# Altium PCB SFCmasterP.PcbDoc
Units mm, origin at the board's own origin, x right, y up, seen from the top; angles counter-clockwise.
Board outline 152.4 x 101.6 mm, 2 copper layers (Top Layer, Bottom Layer); 74 components, 45 nets, 188 pads, 1 vias.
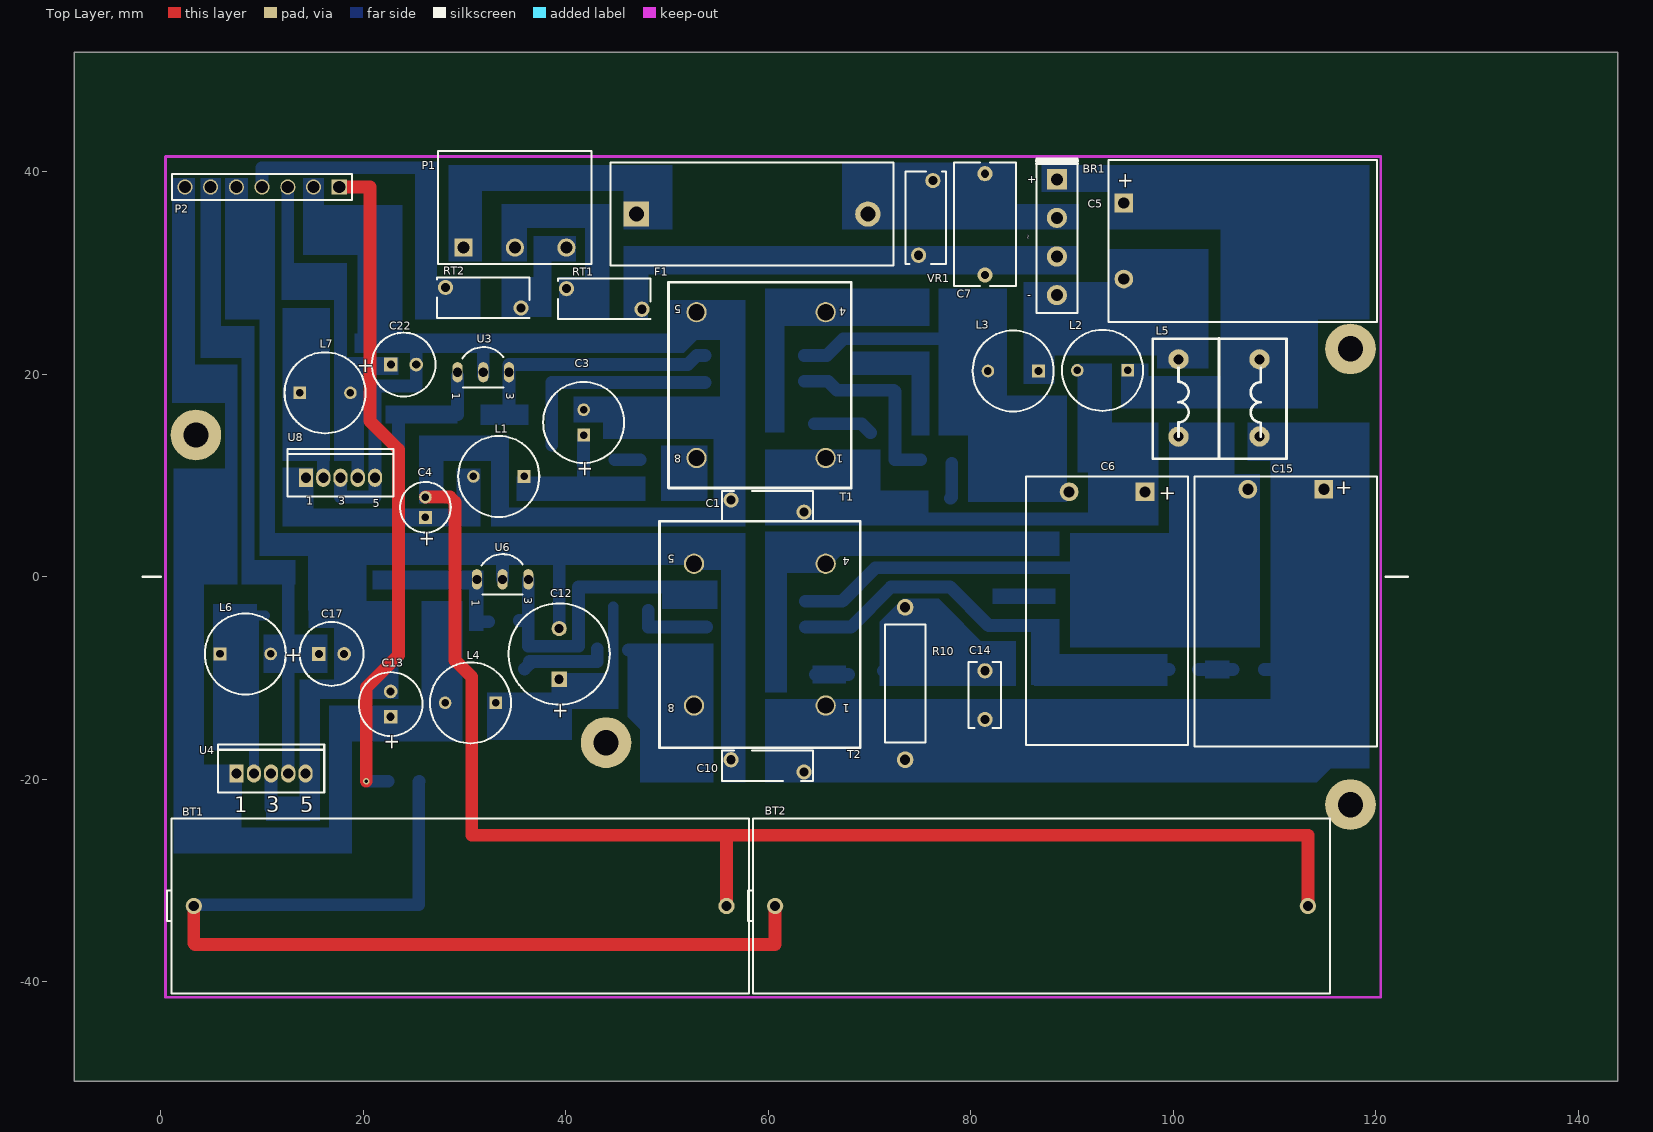
[diagram p0: Top Layer view]
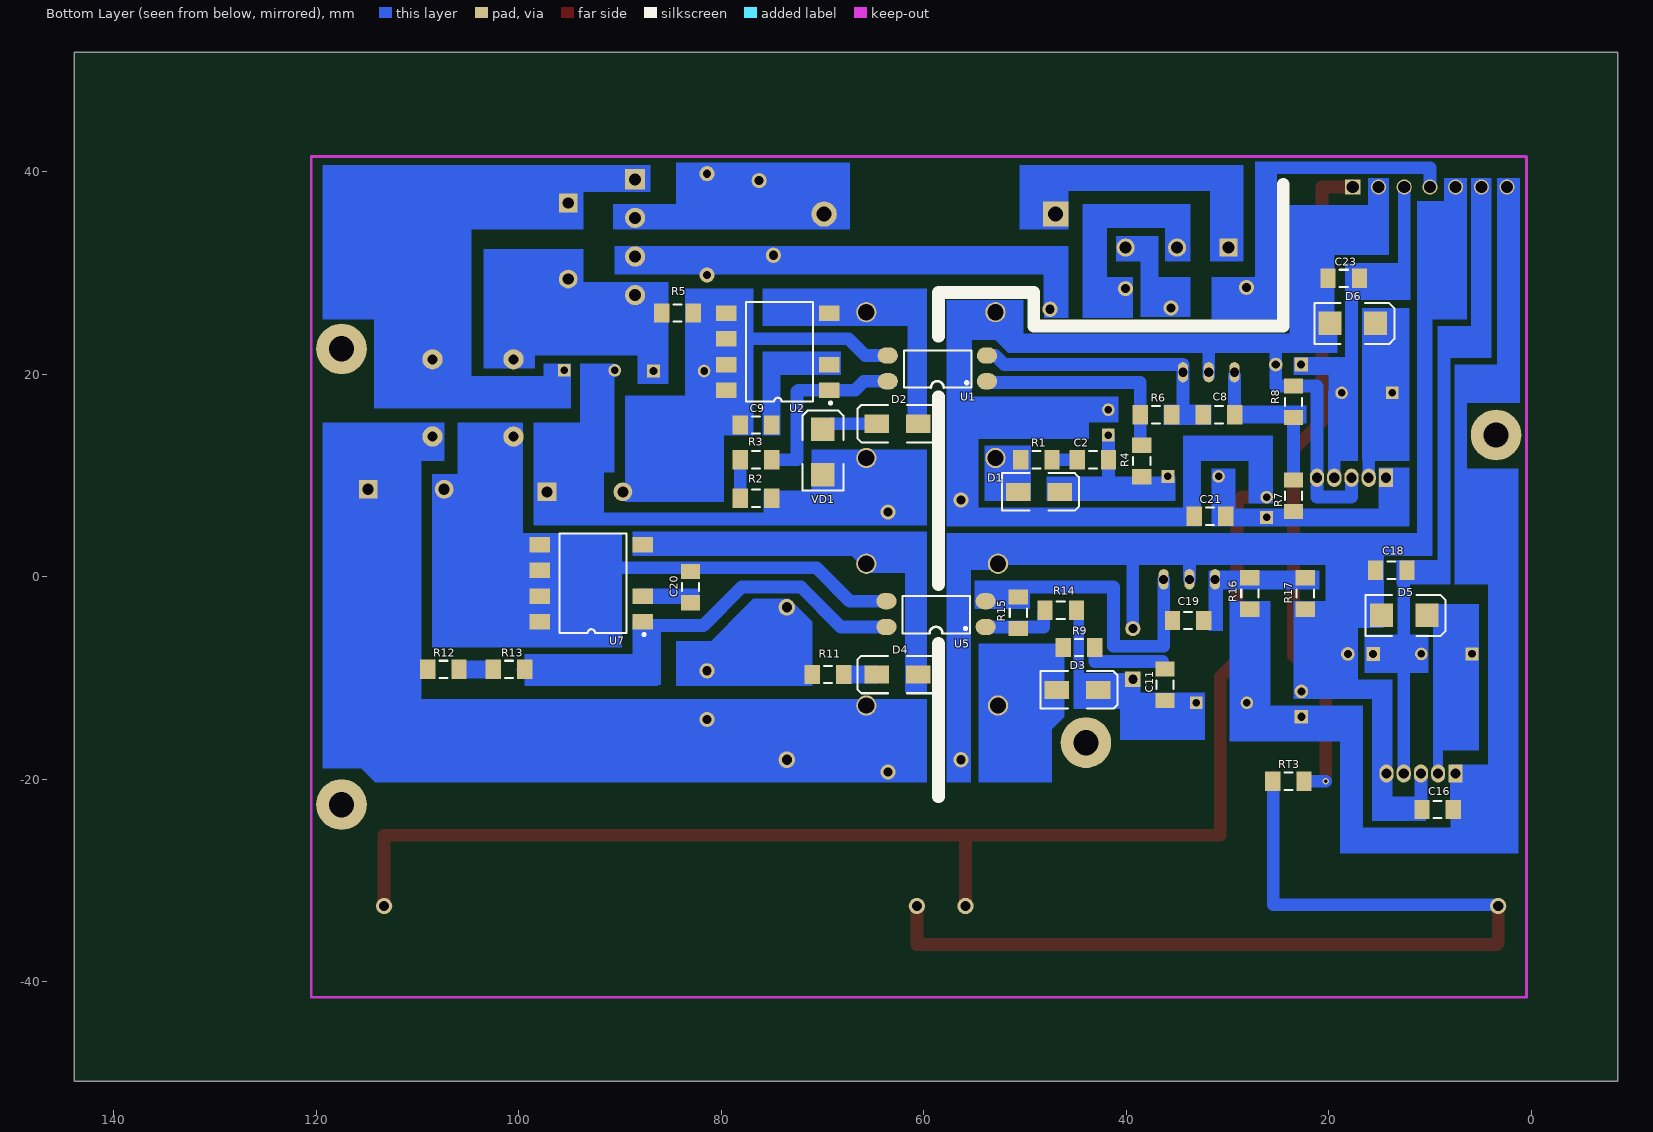
[diagram p1: Bottom Layer view, seen from below]

## Layer stack, top to bottom
Top Solder: solder mask 0.0102, Solder Resist, Dk 3.5
Top Layer: signal copper 0.0356
Dielectric 1: dielectric 0.32, FR-4, Dk 4.8
Bottom Layer: signal copper 0.0356
Bottom Solder: solder mask 0.0102, Solder Resist, Dk 3.5

## Board outline
-8.509,-49.813 143.891,-49.813 143.891,51.787 -8.509,51.787

## Design rules (kind name [scope] priority, off if disabled: settings)
Clearance [All] p1: gap=0.254
ComponentClearance [All] p1: gap=0 collisioncheckmode=3 verticalgap=2540 showdistances=FALSE
PolygonConnect [All] p1: connectstyle=Relief reliefconductorwidth=0.254 reliefentries=4 polygonreliefangle="90 Angle" airgapwidth=0.254
RoutingVias [All] p1: holewidth=0.711 width=1.27 viastyle="Through Hole" minholewidth=0.711 minwidth=1.27 maxholewidth=0.711 maxwidth=1.27
SilkToSilkClearance [All] p1 off: silktosilkclearance=0
SilkToSolderMaskClearance [IsPad] p1 off: minsilkscreentomaskgap=0.254 clearancetoexposedcopper=TRUE
SolderMaskExpansion [All] p1: expansion=0.102
Width Width_POWER_PORT_N [All] p1: maxlimit=2.54 minlimit=0.508 preferedwidth=1.27
Width Width_POWER_PORT_L [InNet('POWER_PORT_L')] p2: maxlimit=2.54 minlimit=0.508 preferedwidth=1.27
Width [All] p3: maxlimit=1.27 minlimit=0.254 preferedwidth=1.27
26 further rules are at their usual default settings.

## Classes and differential pairs
component class powerB: C10 C11 C12 C13 C14 C15 C16 C17 C18 C19 C20 D3 D4 D5 L4 L5 L6 R9 R10 R11 R12 R13 R14 R15 R16 R17 T2 U4 U5 U6 U7
component class powerA: BR1 BT1 BT2 C1 C2 C3 C4 C5 C6 C7 C8 C9 C21 C22 C23 D1 D2 D6 F1 L1 L2 L3 L7 P1 P2 R1 R2 R3 R4 R5 R6 R7 R8 RT1 RT2 RT3 T1 U1 U2 U3 U8 VD1 VR1

## Components (designator, comment, footprint, x,y, rotation, side; value= is the part's Value field where it differs from the comment)
BR1 "KBP310" BRD1 88.519,33.528 r0 top
BT1 "2400mAh" BAT-14500 29.591,-32.512 r0 top locked
BT2 "2400mAh" BAT-14500 86.995,-32.512 r0 top locked
C1 "2.2nF/250V" CAPRD5-9x3B 59.944,6.985 r180 top
C2 "82pF/100V" CAPC3216M 43.307,11.557 r0 bottom
C3 "680uF/16V" CAPPR2.5-8x12 41.783,15.24 r90 top
C4 "100uF/16V" CAPPR2-5x7 26.162,6.858 r90 top
C5 "22uF/450V" CAPPR7.5-16x25B 95.123,33.147 r90 top locked
C6 "22uF/450V" CAPPR7.5-16x25B 93.472,8.382 r0 top
C7 "0.1uF/275V" CAPRD10-12x6 81.407,34.798 r90 top
C8 "0.1uF" CAPC3216M 30.861,16.002 r0 bottom
C9 "10uF/16V" CAPC3216M 76.581,14.986 r0 bottom
C10 "2.2nF/250V" CAPRD5-9x3B 59.944,-18.669 r180 top
C11 "22pF/500V" CAPC3216M 36.195,-10.668 r90 bottom
C12 "330uF/50V" CAPPR5-10x16 39.37,-7.62 r90 top
C13 "100uF/35V" CAPPR2.5-6.3x11.5 22.733,-12.573 r90 top
C14 "3.3nF/1KV" CAPRD5-4.5x3A 81.407,-11.684 r90 top
C15 "47uF/450V" CAPPR7.5-18x25A 111.125,8.636 r180 top
C16 "0.1uF" CAPC3216M 9.271,-22.987 r0 bottom
C17 "220uF/10V" CAPPR2.5-6.3x11.5 16.891,-7.62 r0 top
C18 "0.1uF" CAPC3216M 13.843,0.635 r180 bottom
C19 "0.47nF/50V" CAPC3216M 33.909,-4.318 r0 bottom
C20 "10uF/16V" CAPC3216M 83.058,-1.016 r90 bottom
C21 "0.1uF" CAPC3216M 31.75,5.969 r0 bottom
C22 "220uF/10V" CAPPR2.5-6.3x11.5 24.003,20.955 r0 top
C23 "0.1uF" CAPC3216M 18.542,29.464 r180 bottom
D1 "UF4004" SMA 48.641,8.382 r180 bottom
D2 "FR106(RS1M)" SMA 62.611,15.113 r0 bottom
D3 "UF4004" SMA 44.831,-11.176 r180 bottom
D4 "FR106(RS1M)" SMA 62.611,-9.652 r0 bottom
D5 "1N5825" SMB 12.573,-3.81 r180 bottom
D6 "1N5825" SMB 17.653,25.019 r180 bottom
F1 "BLX-B" FUSE22 58.42,35.814 r0 top
L1 "3.3uH/2.66A" L0810 33.401,9.906 r180 top
L2 "1mH/0.19A" L0810 93.027,20.383 r180 top
L3 "1mH/0.19A" L0810 84.201,20.32 r180 top
L4 "3.3uH/2.66A" L0810 30.607,-12.446 r180 top
L5 "6mH/1.6A" TRF_4A 104.521,17.653 r90 top
L6 "33uH/3A" L0810 8.382,-7.62 r0 top
L7 "33uH/3A" L0810 16.256,18.161 r0 top
P1 "Header A3" DG500HH-5.08-3 35,32.5 r0 top locked
P2 "Header 7" HDR1X7 10.033,38.481 r180 top locked
R1 "130R 1%" RESC3216M 48.895,11.557 r0 bottom
R2 "2M" RESC3216M 76.581,7.747 r180 bottom
R3 "2M" RESC3216M 76.581,11.557 r180 bottom
R4 "130R 1%" RESC3216M 38.481,11.43 r270 bottom
R5 "4.7K" RESC3216M 84.328,26.035 r0 bottom
R6 "1K %1" RESC3216M 37.084,16.002 r0 bottom
R7 "34K 1%" RESC3216M 23.495,8.001 r270 bottom
R8 "13K 1%" RESC3216M 23.495,17.272 r270 bottom
R9 "470R" RESC3216M 44.681,-6.985 r0 bottom
R10 "24K 1W" RES13.55-11.5X4.2 73.533,-10.541 r90 top
R11 "13R" RESC3216M 69.469,-9.652 r180 bottom
R12 "2M" RESC3216M 107.442,-9.144 r0 bottom
R13 "2M" RESC3216M 100.965,-9.144 r180 bottom
R14 "499R 1%" RESC3216M 46.482,-3.302 r180 bottom
R15 "1K %1" RESC3216M 50.673,-3.556 r270 bottom
R16 "130K 1%" RESC3216M 27.813,-1.651 r270 bottom
R17 "15K 1%" RESC3216M 22.352,-1.651 r90 bottom
RT1 "MF72-5D9" CAPRD7.5-11x4A 43.815,27.432 r0 top
RT2 "MF72-5D9" CAPRD7.5-11x4A 31.877,27.559 r0 top
RT3 "500mA/30V" RESC3216M 24.003,-20.193 r0 bottom
T1 "Trans 4C" EE19W(2+2) 59.309,18.923 r180 top locked
T2 "Trans 4C" EE22W(2+2) 59.182,-5.715 r180 top locked
U1 "PS2501-1-K-A" SOP-4 58.674,20.574 r0 bottom
U2 "TNY275GN" SMD-8C 74.422,22.225 r0 bottom
U3 "TL431AILP" TO-92AA 31.877,20.193 r270 top
U4 "LM2596T-5.0" TO-220-5 10.922,-19.431 r0 top
U5 "PS2501-1-K-A" SOP-4 58.801,-3.683 r0 bottom
U6 "TL431AILP" TO-92AA 33.782,-0.254 r270 top
U7 "TNY280GN" SMD-8C 92.837,-0.635 r0 bottom
U8 "LM2596T-5.0" TO-220-5 17.78,9.779 r0 top
VD1 "SMBJ180A" SMB 69.977,12.319 r90 bottom
VR1 "10D471K" CAPRD7.5-7x4C 75.565,35.433 r270 top

## Footprints (in the part's own frame and the unit in brackets; to place one, negate y for a bottom-side part, rotate by r counter-clockwise, add the part's x,y. Pads: shape width x height; smd on the part's side, far side on the other; paste and mask are expansions set on the pad)
BAT-14500 [mm] "14500电池盒57mmx16.8mmx14mm,pitch = 52.6mm"
  round 1.6 hole 1: 1(-26.3,0) 2(26.3,0)
  silkscreen extent -28.96,-8.64 28.5,8.64
BRD1 [mm] "AC-DC Bridge; Body  14.5mm(L)x11.3mm(H)x4mm(W); Lead Dia. 0.5 mm (max)"
  rect 2x2 hole 1.2: 1(0,5.715)
  round 2 hole 1.2: 2(0,1.905) 3(0,-1.905) 4(0,-5.715)
  silkscreen extent -2.03,-7.49 2.03,7.75
CAPC3216M [mm] "Chip Capacitor, Body 3.2x1.6mm, IPC Low Density"
  rect 1.5x1.9 smd: 1(-1.55,0) 2(1.55,0)
  silkscreen extent -0.4,-0.85 0.4,0.85, body extent -1.7,-0.9 1.7,0.9, height 1.35
CAPPR2-5x7 [mm] "Capacitor, Electrolytic, Radial; Body 5 x 7 mm (Dia.xH typ); Pin Spacing 2 mm (typ)"
  rect 1.25x1.25 hole 0.75: 1(-1,0)
  round 1.25 hole 0.75: 2(1,0)
  silkscreen extent -2.5,-2.5 2.5,2.5
CAPPR2.5-6.3x11.5 [mm] "Capacitor, Electrolytic, Radial; Body 6.3 x 11.5 mm (Dia.xH typ); Pin Spacing 2.5 mm (typ)"
  rect 1.35x1.35 hole 0.8: 1(-1.25,0)
  round 1.35 hole 0.8: 2(1.25,0)
  silkscreen extent -3.15,-3.15 3.15,3.15
CAPPR2.5-8x12 [mm] "Capacitor, Electrolytic, Radial; Body 8 x 12 mm (Dia.xH typ); Pin Spacing 2.5 mm (typ)"
  rect 1.25x1.25 hole 0.75: 1(-1.25,0)
  round 1.25 hole 0.75: 2(1.25,0)
  silkscreen extent -4,-4 4,4
CAPPR5-10x16 [mm] "Capacitor, Electrolytic, Radial; Body 10 x 16 mm (Dia.xH typ); Pin Spacing 5 mm (typ)"
  rect 1.5x1.5 hole 0.9: 1(-2.5,0)
  round 1.5 hole 0.9: 2(2.5,0)
  silkscreen extent -5,-5 5,5
CAPPR7.5-16x25B [mm] "Capacitor, Electrolytic, Radial; Body 16 x 25 mm (Dia.xH typ); Pin Spacing 7.5 mm (typ)"
  rect 1.85x1.85 hole 1.1: 1(3.75,0)
  round 1.85 hole 1.1: 2(-3.75,0)
  silkscreen extent -8,-25 8,1.52
CAPPR7.5-18x25A [mm] "Capacitor, Electrolytic, Radial; Body 18 x 25 mm (Dia.xH typ); Pin Spacing 7.5 mm (typ)"
  rect 1.85x1.85 hole 1.1: 1(-3.75,0)
  round 1.85 hole 1.1: 2(3.75,0)
  silkscreen extent -9,-1.27 9,25.4
CAPRD5-4.5x3A [mm] "Capacitor, Ceramic, Thru-Hole, Disc; Body 4.5 x 3mm (LxW max) Pin Spacing 5 mm (typ)"
  round 1.5 hole 0.9: 1(-2.4,0) 2(2.4,0)
  silkscreen extent -3.25,-1.6 3.25,1.6
CAPRD5-9x3B [mm] "Capacitor, Ceramic, Thru-Hole, Disc; Body 9 x 3 mm (LxW max) Pin Spacing 5 mm (typ)"
  round 1.5 hole 0.9: 1(-3.6,0.6) 2(3.6,-0.6)
  silkscreen extent -4.5,-1.5 4.5,1.5
CAPRD7.5-7x4C [mm] "Capacitor, Ceramic, Thru-Hole, Disc; Body 7 x 4 mm (LxW max) Pin Spacing 7.5 mm (typ)"
  round 1.5 hole 0.9: 1(-3.684,0.7) 2(3.684,-0.7)
  silkscreen extent -4.57,-2 4.57,2
CAPRD7.5-11x4A [mm] "Capacitor, Ceramic, Thru-Hole, Disc; Body 11 x 4 mm (LxW max) Pin Spacing 7.5 mm (typ)"
  round 1.5 hole 0.9: 1(-3.725,1.016) 2(3.725,-1.016)
  silkscreen extent -4.57,-2 4.57,2
CAPRD10-12x6 [mm] "Capacitor, Ceramic, Thru-Hole, Disc; Body 12 x 6 mm (LxW max) Pin Spacing 10.0 mm (typ)"
  round 1.5 hole 0.8: 1(-5,0) 2(5,0)
  silkscreen extent -6.1,-3.05 6.1,3.05
DG500HH-5.08-3 [mm] "Connector; Header; 2 Position,Pitch 5.08 mm"
  rect 1.8x1.8 hole 1.2: 1(-5.08,0)
  round 1.8 hole 1.2: 2(0,0) 3(5.08,0)
  silkscreen extent -7.58,-1.6 7.58,9.56
EE19W(2+2) [mm] "EE19 switch transfor pitch 14.4"
  round 2 hole 1.6: 1(-6.375,7.2) 4(-6.375,-7.2) 5(6.375,-7.2) 8(6.375,7.2)
  silkscreen extent -8.89,-10.16 9.14,10.16
EE22W(2+2) [mm] "EE22 switch transfor pitch 14.4"
  round 2 hole 1.6: 1(-6.5,7) 4(-6.5,-7) 5(6.5,-7) 8(6.5,7)
  silkscreen extent -9.91,-11.18 9.91,11.18
FUSE22 [mm] "Fuse, Thru-Hole; 2 Leads; Body 26 x 10 x 16 mm (LxWxH max),Space=22mm"
  rect 2.5x2.5 hole 1.5: 1(-11.43,0)
  round 2.5 hole 1.5: 2(11.43,0)
  silkscreen extent -13.97,-5.08 13.97,5.08
HDR1X7 [mm] "Connector; Header; 7 Position;Pitch 2.54mm"
  rect 1.5x1.5 hole 1.2: 1(-7.62,0)
  round 1.5 hole 1.2: 2(-5.08,0) 3(-2.54,0) 4(0,0) 5(2.54,0) 6(5.08,0) 7(7.62,0)
  silkscreen extent -8.89,-1.27 8.89,1.27
L0810 [mm] "Inductor, Electrolytic, Radial; Body 8 x 10 mm (Dia.xH typ); Pin Spacing 5 mm (typ)"
  rect 1.25x1.25 hole 0.75: 1(-2.5,0)
  round 1.25 hole 0.75: 2(2.5,0)
  silkscreen extent -4,-4 4,4
RES13.55-11.5X4.2 [mm] "Resistor, Axial; Body 11.5 x 4.2 mm (LxDia. max), Lead Dia. 0.65 mm (max)"
  round 1.65 hole 1: 1(-7.525,0) 2(7.525,0)
  silkscreen extent -5.84,-2 5.84,2
RESC3216M [mm] "Chip Resistor, Body 3.2x1.6mm, IPC Low Density"
  rect 1.5x1.9 smd: 1(-1.55,0) 2(1.55,0)
  silkscreen extent -0.4,-0.85 0.4,0.85, body extent -1.68,-0.87 1.68,0.87, height 0.71
SMA [mm] "DO-214-AC/SMA; 2 C-Bend Leads; Body 5 x 2.7 mm, inc. leads (LxW)"
  rect 2.4x1.8 smd: 1(-2.05,0) 2(2.05,0)
  silkscreen extent -3.65,-1.85 3.95,1.85
SMB [mm] "DO-214-AA/SMB; 2 C-Bend Leads; Body 5.3 x 3.6 mm, inc. leads (LxW)"
  rect 2.3x2.3 smd: 1(-2.25,0) 2(2.25,0)
  silkscreen extent -3.8,-2.03 4.1,2.03
SMD-8C [mil] "Small Outline; 8 Leads; Body Width 9.65 mm; Pitch 2.54 mm"
  rect 80x60 smd: 1(-200,150) 2(-200,50) 4(-200,-150) 5(200,-150) 6(200,-50) 7(200,50) 8(200,150)
  silkscreen extent -210,-193 124,205
SOP-4 [mm] "body=6.5mmx4.58mm(LxW),pitch=2.54mm"
  oval 2x1.6 smd: 1(-4.9,1.27) 2(-4.9,-1.27) 3(4.9,-1.27) 4(4.9,1.27)
  silkscreen extent -3.36,-1.78 3.3,1.91
TO-92AA [mm] "TO, Flat Index; 3 In-Line, Axial Leads; Body Dia. 4.5mm; Leads 0.51 x 0.48 mm (max);pitch 2.54mm"
  oval 2x1 hole 0.9: 1(0,-2.54) 2(0,0) 3(0,2.54)
  silkscreen extent -2.48,-2.07 1.5,1.99
TO-220-5 [mm] "TO, Thru-Hole, Vertical, Heatsink Mounted; 5 In-Line Leads; Pitch 1.70 mm"
  rect 1.4x1.8 hole 1: 1(-3.4,0)
  oval 1.4x1.8 hole 1: 2(-1.7,0) 3(0,0) 4(1.7,0) 5(3.4,0)
  silkscreen extent -5.25,-1.85 5.25,2.85
TRF_4A [mm] "pitch 7.62mmx8mm(LxW)"
  round 2 hole 1: 1(-3.816,4) 2(-3.804,-4) 3(3.816,4) 4(3.816,-4)
  silkscreen extent -5.98,-6.67 5.92,6.54

## Part data
BR1: library part KP210, "AC-DC Bridge"
BT1 BT2: library part Battery, "Battery holder"
C1 C2 C7 C8 C9 C10 C11 C14 C16 C18 C19 C20 C21 C23: library part Cap, "Capacitor"
C3 C4 C5 C6 C12 C13 C15 C17 C22: library part "Cap Pol1", "Polarized Capacitor (Radial)"
D1 D2 D3 D4: library part "Diode 1N4148", "High Conductance Fast Diode"
D5 D6 VD1: library part "D Zener", "Zener Diode"
F1: library part "Fuse 1", "Fuse Holder 25mm(L)x10mm(W)x13mm(H)"
L1 L2 L3 L4: library part "Inductor Iron Dot", "Magnetic-Core Inductor with Winding Polarity Marking"
L5: library part "Inductor Iron Dot Inphase", "Conjugate stream coil,pitch 7.62mmx8mm(LxW)"
L6 L7: library part Inductor, "Inductor with Winding No Polarity Marking"
P1: "Header, 3-Pin"
P2: "Header, 7-Pin"
R1 R2 R3 R4 R5 R6 R7 R8 R9 R10 R11 R12 R13 R14 R15 R16 R17: library part "Res Semi", "Metal film Resistor"
RT1 RT2 RT3: library part "Res Thermal", "Thermistor"
T1 T2: "Transformer"
U1 U5: library part PC817D, "Single-Supply Dual Operational Amplifier,10MHz"
U2 U7: library part TNY279PN
U3 U6: library part TL431CLP, "Programmable Precision Reference"
U4 U8: "5V稳压芯片"
VR1: library part "Res Varistor", "Varistor (Voltage-Sensitive Resistor)"

## Free pads (board coordinates)
  round 5 hole 2.5: 0(3.5,14) 0(44,-16.38) 0(117.5,-22.5) 0(117.5,22.5)

## Via types
v1: diameter 0.6, hole 0.3, Top Layer to Bottom Layer, 1 vias

## Nets (pads, with @x,y where several pads share a name; then routed paths per layer and width w, separated by ;. In a path a pad name is that pad's centre, name@x,y a point inside that pad or via, vN(x,y) a via of type N, cw(c..) or ccw(c..) an arc to the next point about the centre after c; other vN are vias at no path point)
5V: C22.1 C23.2 L7.2 P2.3 U8.4 | length 39.7
  Bottom Layer w1.27: P2.3 12.573,29.464 17.78,29.464 17.78,20.955 C22.1 ; 18.542,20.955 18.756,20.741 L7.2 19.48,18.161 U8.4
5VA: C17.1 C18.2 L6.2 P2.6 U4.4 | length 70.3
  Bottom Layer w1.27: P2.6 4.953,22.987 8.636,22.987 8.636,0.762 12.622,0.762 12.622,-7.62 ; L6.2 12.622,-7.62 ; U4.4 12.622,-7.62 ; C17.1 12.622,-7.62
9V: C4.1 C21.1 L1.2 R7.2 U8.1 | length 19.5
  Bottom Layer w1.27: U8.1@14.38,9.623 14.38,6.096 C4.1@26.162,6.096 ; C21.1 30.901,6.67 L1.2
24V: C13.1 C16.1 L4.2 P2.7 R16.2 U4.1 | length 130.3
  Bottom Layer w1.27: P2.7 2.413,19.558 6.985,19.558 6.985,1.016 3.175,1.016 3.175,-25.908 17.653,-25.908 17.653,-13.823 26.226,-13.823 ; 3.175,-15.113 3.429,-15.113 3.048,-15.494 3.048,-19.431 7.291,-19.431 7.519,-19.203 7.519,-19.307 7.395,-19.431 C16.1@7.395,-22.987 ; L4.2 R16.2@28.107,-3.201
D+: BR1.1 C5.1 L2.1 L5.4 | length 55
  Bottom Layer w1.27: BR1.1 95.123,39.243 C5.1 108.521,36.897 108.521,18.796 95.591,18.796 L2.1@95.591,20.383
D-: BR1.4 C5.2 L3.1 L5.3 R5.2 | length 31
  Bottom Layer w1.27: R5.2 86.955,26.035 86.955,23.495 93.498,23.495 ; L3.1@86.955,20.32 86.955,23.328 87.463,23.328 87.63,23.495 ; 87.463,26.035 87.463,26.757 BR1.4 ; 93.599,23.495 100.521,23.495 L5.3 ; 95.123,23.495 C5.2
DC1+: C1.1 C6.1 L2.2 R2.2 T1.1 VD1.1 | length 61.7
  Bottom Layer w1.27: C1.1 65.684,6.385 ; T1.1 65.684,6.385 ; VD1.1@70.358,10.196 70.358,6.385 65.684,6.385 ; 70.866,7.747 74.904,7.747 74.904,5.715 93.218,5.715 93.218,20.383 L2.2 ; 93.218,7.747 C6.1@97.222,7.747
DC1-: C6.2 C9.2 L3.2 R5.1 U1.3 U2.5 U2.6 U2.7 U2.8 | length 53
  Bottom Layer w1.27: U1.3 65.786,21.844 67.437,23.495 U2.6@79.629,23.495 ; C9.2 80.01,14.986 ; U2.7@79.629,20.32 L3.2 ; R5.1 79.629,26.035 79.629,14.605 80.645,15.621 80.645,8.382 C6.2
DC2+: C10.1 C14.1 C15.1 L5.2 R10.1 R12.2 T2.1 | length 96.5
  Bottom Layer w1.27: C10.1 63.544,-14.338 65.786,-14.338 ; T2.1@65.682,-12.915 65.682,-14.234 65.786,-14.338 ; R10.1 73.533,-14.338 ; 73.66,-13.589 73.533,-13.716 73.533,-14.338 ; L5.2@108.521,13.722 111.887,13.722 111.887,7.366 ; R12.2 111.76,-9.144 ; 114.875,7.366 111.887,7.366 ; 65.786,-14.338 73.533,-14.338 ; 73.533,-14.338 111.887,-14.338 111.887,7.366
DC2-: C15.2 C20.2 L5.1 U5.3 U7.5 U7.6 U7.7 U7.8 | length 62
  Bottom Layer w1.27: U5.3 67.31,-2.413 70.612,0.889 97.663,0.889 U7.6 U7.5 100.521,3.175 100.521,7.433 ; U7.8 97.917,-0.254 ; L5.1 100.521,8.001 C15.2@107.375,8.001
FG: P2.4 RT2.1 | length 31.8
  Bottom Layer w1.27: P2.4 10.033,40.386 25.908,40.386 25.908,28.575 RT2.1
GND: BT1.2 BT2.2 C1.2 C3.2 C4.2 C21.2 C22.2 C23.1 D6.1 P2.2 R8.1 T1.5 U3.2 U8.3 U8.5 | length 298.4
  Top Layer w1.27: C4.2 28.591,7.858 29.083,7.366 29.083,-8.255 30.734,-9.906 30.734,-25.527 113.295,-25.527 BT2.2 ; BT1.2 55.891,-25.665
  Bottom Layer w1.27: P2.2 15.113,35.179 20.066,35.179 20.066,22.733 24.999,22.733 ; U8.3@17.78,9.652 U8.3 17.78,7.874 21.18,7.874 U8.5 21.18,18.796 ; 21.206,18.822 R8.1 25.253,18.822 25.253,22.733 51.054,22.733 51.054,25.908 51.269,26.123 T1.5 57.15,26.123 57.15,7.585 55.582,7.585 55.582,6.223 33.274,6.223 33.274,12.573 26.162,12.573 C4.2 ; U3.2@31.877,19.844 31.877,22.733 ; C3.2 57.15,16.49
GNDA: C10.2 C12.2 C13.2 C16.2 C17.2 C18.1 D5.1 P2.5 R17.1 T2.5 U4.3 U4.5 U6.2 | length 165.9
  Bottom Layer w1.27: P2.5 7.493,26.797 10.414,26.797 10.414,3.372 52.705,3.372 52.705,1.285 56.261,1.285 C10.2@56.261,-18.069 ; U4.3 10.922,-22.86 14.351,-22.86 14.351,-11.323 C13.2 ; 15.22,3.372 15.22,-3.175 15.246,-3.201 18.161,-3.201 ; 18.161,-11.303 18.161,-3.201 ; R17.1 18.161,-3.201 ; U6.2 33.782,3.302 ; C12.2 39.37,3.302
NetBR1_2: BR1.2 C7.2 F1.2 VR1.1 | length 26.9
  Bottom Layer w1.27: F1.2 70.231,35.433 76.265,35.433 ; VR1.1@76.219,39.163 VR1.1 76.265,35.433 ; C7.2 81.407,35.433 ; BR1.2 81.407,35.433 ; 76.265,35.433 81.407,35.433
NetBT1_1: BT1.1 BT2.1 RT3.2 | length 99.4
  Top Layer w1.27: BT1.1 3.291,-36.184 3.418,-36.311 60.695,-36.311 BT2.1
  Bottom Layer w1.27: BT1.1@3.291,-32.385 25.5,-32.385 25.5,-20.246 RT3.2
NetC2_1: C2.1 C3.1 D1.2 L1.1 R4.2 | length 17.6
  Bottom Layer w1.27: L1.1 35.901,8.676 41.91,8.676 ; C3.1@41.757,13.99 41.757,8.829 41.91,8.676 ; D1.2@46.863,8.676 41.91,8.676
NetC2_2: C2.2 R1.1 | length 2.5
  Bottom Layer w1.27: C2.2 R1.1
NetC8_1: C8.1 R7.1 R8.2 U3.1 | length 16
  Bottom Layer w1.27: R7.1@23.495,9.652 23.495,15.902 23.595,16.002 28.194,16.002 ; 28.194,16.129 28.321,16.002 C8.1 ; C8.1@29.337,16.002 U3.1@29.337,19.844
NetC8_2: C8.2 R6.1 U1.2 U3.3 | length 27.1
  Bottom Layer w1.27: 33.274,15.875 R6.1@35.534,15.875 ; 34.417,15.875 34.417,20.955 52.07,20.955 52.959,21.844 U1.2
NetC9_1: C9.1 U2.2 | length 11.4
  Bottom Layer w1.27: U2.2@69.596,20.955 75.031,20.955 C9.1
NetC11_1: C11.1 C12.1 D3.2 L4.1 R14.2 | length 21.9
  Bottom Layer w1: D3.2@43.942,-11.303 44.704,-10.541 R14.2@44.704,-2.921
  Bottom Layer w1.27: L4.1 40.005,-12.446 C12.1@40.005,-10.12 ; 40.005,-11.303 D3.2@43.942,-11.303
NetC11_2: C11.2 R9.1 | length 8.9
  Bottom Layer w1.27: C11.2@35.941,-9.118 36.449,-8.61 36.449,-8.382 43.131,-8.382 R9.1@43.131,-7.112
NetC14_2: C14.2 R10.2 R11.1 | length 16.7
  Bottom Layer w1.27: R11.1@71.374,-9.284 C14.2 ; 73.533,-9.665 R10.2
NetC19_1: C19.1 R16.1 R17.2 U6.1 | length 14.4
  Bottom Layer w1.27: R17.2 31.242,-0.101 31.242,-4.445 C19.1@32.385,-4.445
NetC19_2: C19.2 R15.1 U5.2 U6.3 | length 32.3
  Bottom Layer w1.27: C19.2@35.433,-4.318 36.322,-4.318 ; U6.3 36.322,-6.858 41.275,-6.858 41.275,-1.016 50.546,-1.016 50.546,-2.413 U5.2
NetC20_1: C20.1 U7.2 | length 4.4
  Bottom Layer w1.27: C20.1@83.058,-1.905 U7.2@87.503,-1.905
NetD1_1: D1.1 R1.2 T1.8 | length 8.2
  Bottom Layer w1.27: R1.2 50.445,11.723 T1.8 52.934,8.382 D1.1
NetD2_1: D2.1 T1.4 U2.4 | length 20.2
  Bottom Layer w1.27: D2.1@60.661,15.113 60.661,25.863 60.921,26.123 T1.4 69.889,26.123 U2.4@69.977,26.035
NetD2_2: D2.2 VD1.2 | length 5.9
  Bottom Layer w1.27: D2.2@64.561,15.113 69.215,15.113 VD1.2@70.104,14.224
NetD3_1: D3.1 R9.2 T2.8 | length 12.4
  Bottom Layer w1.27: R9.2@46.228,-7.239 47.117,-7.239 47.117,-13.215 T2.8@52.682,-13.215
NetD4_1: D4.1 T2.4 U7.4 | length 38.7
  Bottom Layer w1.27: D4.1@60.833,-9.652 60.833,1.285 65.482,1.285 67.372,3.175 87.63,3.175 U7.4@87.757,3.048
NetD4_2: D4.2 R11.2 | length 3.3
  Bottom Layer w1.27: D4.2@64.688,-9.652 R11.2@67.945,-9.652
NetD5_2: D5.2 L6.1 U4.2 | length 20.1
  Bottom Layer w1: L6.1 9.222,-7.62 ; U4.2 9.222,-7.62 ; D5.2 9.222,-3.81 9.222,-7.62
NetD6_2: D6.2 L7.1 U8.2 | length 19.1
  Bottom Layer w1.27: D6.2@15.276,25.019 15.276,18.161 L7.1 16.08,18.161 U8.2
NetR2_1: R2.1 R3.1 | length 3.5
  Bottom Layer w1.27: R2.1@78.004,7.747 78.131,7.874 R3.1@78.131,11.176
NetR3_2: R3.2 U1.4 U2.1 | length 18.6
  Bottom Layer w1.27: U1.4 65.913,19.304 66.802,18.415 72.39,18.415 72.517,18.288 72.517,11.557 R3.2
NetR4_1: R4.1 R6.2 U1.1 | length 21.3
  Bottom Layer w1.27: R4.1@38.634,12.98 38.634,19.177 U1.1@53.774,19.177
NetR12_1: R12.1 R13.1 | length 3.4
  Bottom Layer w1.27: R13.1 R12.1
NetR13_2: R13.2 U5.4 U7.1 | length 43.4
  Bottom Layer w1.27: U5.4 68.199,-4.953 72.136,-1.016 77.978,-1.016 81.788,-4.826 87.757,-4.826 87.757,-9.144 R13.2@99.568,-9.144
NetR14_1: R14.1 R15.2 U5.1 | length 7.4
  Bottom Layer w1.27: R14.1@48.159,-3.302 48.159,-4.953 U5.1
POWER_PORT_GND: P1.3 RT2.2 | length 10.6
  Bottom Layer w1.27: RT2.2 37.719,26.543 37.719,32.5 P1.3 ; P1.3@40.005,32.347 P1.3@40.119,32.461
POWER_PORT_L: F1.1 P1.1 | length 29
  Bottom Layer w1.27: P1.1 29.92,39.37 48.387,39.37 48.387,35.687
POWER_PORT_N: P1.2 RT1.1 | length 20.2
  Bottom Layer w1.27: P1.2 35,35.306 42.799,35.306 42.799,28.448 RT1.1
POWER_PORT_RT: BR1.3 C7.1 RT1.2 VR1.2 | length 48
  Bottom Layer w1.27: RT1.2 47.54,31.604 81.407,31.604 ; C7.1 81.407,31.604 ; BR1.3@88.519,31.604 81.407,31.604
VBAT_SRC: P2.1 RT3.1 | length 66.3
  Top Layer w1.27: P2.1 20.701,38.481 20.701,15.367 23.495,12.573 23.495,-7.747 20.32,-10.922 v1(20.32,-20.193)
  Bottom Layer w1.27: v1(20.32,-20.193) RT3.1

## Keep-outs
Keep-Out Layer:
  lines w0.254: 0.5,-41.5 0.5,41.5 120.5,41.5 120.5,-41.5 0.5,-41.5

## Other copper
Bottom Layer:
  rectangle net 9V: 12.065,6.096 15.113,10.795
  region net 5V: 11.938,30.988 11.938,27.305 18.415,27.305 18.415,30.988
  region net NetD6_2: 16.764,26.543 12.065,26.543 12.065,11.43 16.764,11.43
  region net 5V: 18.415,28.702 18.415,30.48 12.827,30.48 12.827,28.702
  region net 24V: 7.62,17.145 7.62,20.955 1.143,20.955 1.143,17.145
  region net 5VA: 9.271,21.59 9.271,24.765 3.937,24.765 3.937,21.59
  region net 5VA: 13.335,-0.762 13.335,1.651 8.001,1.651 8.001,-0.762
  region net GNDA: 11.303,25.4 11.303,37.084 6.35,37.084 6.35,25.4
  region net NetC19_2: 54.991,-3.175 54.991,-0.381 49.53,-0.381 49.53,-3.175
  rectangle net NetC19_1: 30.48,-5.334 31.877,0.635
  region net NetC19_1: 20.955,0.635 20.955,-1.27 31.75,-1.27 31.75,0.635
  region net 5VA: 10.16,-5.715 10.16,-9.525 16.51,-9.525 16.51,-5.715
  region net GNDA: 17.145,-2.413 17.145,-10.922 23.495,-10.922 23.495,-2.413
  region net GNDA: 13.716,-10.16 13.716,-12.065 23.495,-12.065 23.495,-10.16
  region net GNDA: 15.748,-10.668 13.716,-10.668 13.716,-24.13 15.748,-24.13
  region net 5V: 23.495,19.939 23.495,21.717 18.923,21.717 18.923,19.939
  rectangle net 5V: 17.145,11.43 20.066,21.717
  region net 9V: 12.065,6.731 12.065,4.953 31.115,4.953 31.115,6.731
  region net NetC8_2: 31.623,17.018 31.623,14.986 36.322,14.986 36.322,17.018
  rectangle net NetC19_2: 49.911,-3.175 54.356,-1.651
  region net D+: 119.38,25.4 119.38,40.64 110.744,40.64 110.744,25.4
  region net DC2+: 119.38,-18.923 119.38,-14.478 86.487,-14.478 86.487,-18.923
  region net NetC14_2: 78.867,-10.12 81.831,-7.155 76.835,-2.159 73.871,-5.123
  region net NetC14_2: 76.835,-6.985 76.835,-2.159 73.279,-2.159 73.279,-6.985
  region net NetR13_2: 88.773,-10.668 88.773,-4.191 85.979,-4.191 85.979,-10.668
  rectangle net NetC20_1: 82.169,-2.667 88.392,-1.143
  region net NetC9_1: 74.168,22.225 74.168,13.97 75.946,13.97 75.946,22.225
  region net NetC9_1: 75.692,22.225 68.199,22.225 68.199,19.939 75.692,19.939
  region net GND: 51.689,22.098 54.356,24.765 53.023,26.098 50.355,23.431
  rectangle net 24V: 16.637,-16.256 29.21,-12.7
  region net 24V: 25.781,-2.413 25.781,-16.256 29.845,-16.256 29.845,-2.413
  region net GNDA: 57.785,-20.32 57.785,2.159 55.372,2.159 55.372,-20.32
  rectangle net NetBR1_2: 67.31,34.29 84.455,40.894
  rectangle net POWER_PORT_N: 33.655,34.417 44.323,36.83
  rectangle net POWER_PORT_N: 33.655,31.115 36.195,36.195
  region net POWER_PORT_L: 31.75,31.115 31.75,40.64 28.448,40.64 28.448,31.115
  rectangle net POWER_PORT_L: 45.72,34.29 50.546,40.64
  rectangle net POWER_PORT_N: 41.91,27.686 44.323,36.322
  region net POWER_PORT_L: 47.244,38.1 47.244,40.64 31.242,40.64 31.242,38.1
  rectangle net POWER_PORT_RT: 46.863,29.845 90.551,32.639
  rectangle net POWER_PORT_N: 39.37,25.527 44.323,29.591
  rectangle net NetBR1_2: 83.312,34.29 90.678,36.83
  rectangle net D-: 85.217,21.844 103.505,29.083
  region net D-: 88.265,19.05 88.265,29.083 85.217,29.083 85.217,19.05
  region net D+: 110.998,19.812 94.869,19.812 94.869,16.637 110.998,16.637
  region net D+: 104.648,40.64 104.648,16.637 114.3,16.637 114.3,40.64
  rectangle net D+: 86.995,37.973 109.601,40.64
  rectangle net D+: 93.599,34.29 106.426,38.608
  region net DC1+: 93.98,10.287 93.98,21.082 90.551,21.082 90.551,10.287
  region net DC1+: 98.552,15.24 91.567,15.24 91.567,5.08 98.552,5.08
  region net DC2+: 118.618,15.24 107.315,15.24 107.315,11.43 118.618,11.43
  region net DC2+: 109.601,15.24 109.601,-15.24 119.38,-15.24 119.38,15.24
  region net DC2-: 99.568,15.24 99.568,3.556 106.045,3.556 106.045,15.24
  rectangle net DC2-: 99.949,1.27 108.585,10.16
  rectangle net DC2-: 89.789,-6.985 108.585,4.318
  rectangle net DC2+: 62.103,-16.002 118.745,-12.065
  region net NetR12_1: 105.537,-10.033 105.537,-8.255 103.124,-8.255 103.124,-10.033
  region net NetR13_2: 99.415,-7.62 86.233,-7.62 86.233,-10.795 99.415,-10.795
  region net DC1-: 76.835,28.448 76.835,13.97 83.566,13.97 83.566,28.448
  region net DC1-: 79.756,17.907 79.756,7.366 83.566,7.366 83.566,17.907
  region net DC1-: 82.677,17.907 82.677,7.366 89.535,7.366 89.535,17.907
  rectangle net DC1+: 59.69,5.08 71.12,12.573
  rectangle net DC1+: 70.866,5.08 75.819,8.509
  rectangle net NetC14_2: 70.993,-10.795 84.455,-6.35
  rectangle net NetD4_2: 64.389,-10.541 67.691,-8.763
  region net DC2+: 86.614,-20.32 86.614,-12.065 59.69,-12.065 59.69,-20.32
  region net NetD4_1: 88.773,4.445 59.69,4.445 59.69,2.032 88.773,2.032
  region net NetD4_1: 59.69,3.683 59.69,-11.43 61.849,-11.43 61.849,3.683
  rectangle net NetD2_1: 59.69,24.765 75.946,28.448
  region net NetD2_1: 61.595,14.224 61.595,27.559 59.69,27.559 59.69,14.224
  region net GND: 57.785,5.588 57.785,17.526 54.61,17.526 54.61,5.588
  region net GND: 57.785,15.494 57.785,26.797 55.245,26.797 55.245,15.494
  region net GND: 57.785,27.305 50.165,27.305 50.165,23.368 57.785,23.368
  region net GND: 51.689,24.003 19.177,24.003 19.177,22.098 51.689,22.098
  region net GND: 55.753,17.78 43.688,17.78 43.688,13.589 55.753,13.589
  region net GND: 46.609,17.78 40.767,17.78 40.767,15.24 46.609,15.24
  region net NetC2_1: 47.879,9.906 35.179,9.906 35.179,7.493 47.879,7.493
  region net GND: 57.785,6.604 34.417,6.604 34.417,4.953 57.785,4.953
  region net GND: 32.639,13.97 32.639,4.953 34.417,4.953 34.417,13.97
  rectangle net GND: 25.527,11.43 34.417,13.97
  region net GND: 27.94,7.239 27.94,12.7 25.527,12.7 25.527,7.239
  region net 9V: 29.21,10.668 29.21,4.953 31.623,4.953 31.623,10.668
  rectangle net GNDA: 14.605,1.143 57.785,4.318
  region net GNDA: 11.303,27.305 9.779,27.305 9.779,2.032 11.303,2.032
  region net D-: 103.505,24.33 98.385,24.33 98.385,20.574 103.505,20.574
  region net D+: 97.536,21.082 94.869,21.082 94.869,19.685 97.536,19.685
  region net D-: 93.599,32.385 93.599,28.916 103.505,28.916 103.505,32.385
  rectangle net 24V: 16.637,-26.035 18.923,-15.875
  region net 24V: 18.923,-27.305 18.923,-24.765 1.27,-24.765 1.27,-27.305
  region net 24V: 4.318,0.635 1.27,0.635 1.27,-26.035 4.318,-26.035
  region net 24V: 1.905,-18.542 1.905,-26.035 8.001,-26.035 8.001,-18.542
  region net NetD5_2: 5.207,-2.667 5.207,-17.145 9.525,-17.145 9.525,-2.667
  region net GNDA: 14.605,4.318 14.605,-5.08 20.32,-5.08 20.32,4.318
  rectangle net 24V: 1.143,20.447 3.429,39.37
  region net GNDA: 14.859,2.032 14.859,4.318 10.541,4.318 10.541,2.032
  rectangle net GND: 19.431,22.098 23.876,36.576
  region net GND: 16.129,34.29 16.129,39.37 14.097,39.37 14.097,34.29
  region net GND: 23.876,36.703 14.097,36.703 14.097,31.75 23.876,31.75
  region net POWER_PORT_RT: 48.133,32.639 45.72,32.639 45.72,25.527 48.133,25.527
  region net POWER_PORT_GND: 37.011,33.655 37.011,31.115 41.021,31.115 41.021,33.655
  rectangle net POWER_PORT_GND: 36.83,25.654 38.608,33.655
  region net POWER_PORT_GND: 37.792,25.654 37.792,29.591 33.655,29.591 33.655,25.654
  region net FG: 31.623,25.4 31.623,29.591 25.146,29.591 25.146,25.4
  region net FG: 27.305,41.021 25.146,41.021 25.146,29.464 27.305,29.464
  region net NetC11_1: 38.608,-9.525 38.608,-13.081 45.212,-13.081 45.212,-9.525
  rectangle net NetD3_1: 46.101,-13.843 54.61,-6.604
  rectangle net NetD1_1: 49.403,7.493 54.015,12.954
  region net NetC8_1: 29.337,15.113 29.337,16.891 22.225,16.891 22.225,15.113
  region net GNDA: 8.636,27.432 8.636,39.37 6.35,39.37 6.35,27.432
  region net 5VA: 5.969,22.352 5.969,39.37 3.937,39.37 3.937,22.352
  region net 24V: 7.62,-0.762 7.62,10.668 1.27,10.668 1.27,-0.762
  rectangle net GNDA: 10.414,-24.13 15.748,-21.717
  region net NetD3_1: 54.61,-13.215 47.371,-13.215 47.371,-20.32 54.61,-20.32
  region net NetD3_1: 48.835,-16.577 50.438,-14.974 47.704,-12.24 46.101,-13.843
  region net NetC11_1: 40.64,-11.43 32.258,-11.43 32.258,-16.129 40.64,-16.129
  region net DC2+: 114.173,-20.32 114.173,-18.161 86.36,-18.161 86.36,-20.32
  region net DC2+: 115.697,-18.796 114.872,-17.971 113.348,-19.495 114.173,-20.32
  region net NetC14_2: 75.227,-4.107 73.279,-2.159 70.993,-4.445 72.941,-6.393
  rectangle net NetC14_2: 70.993,-10.795 73.406,-4.445
  rectangle net NetD4_1: 60.325,0.381 65.786,3.175

## Silkscreen, mask and mechanical layers (free items; w line width, h text height)
Top Overlay:
  lines w0.254: -1.749,0 0,0 ; 121,0 123.161,0
Bottom Overlay:
  lines w1.27: 24.511,38.735 24.511,24.765 26.543,24.765 49.149,24.765 49.149,28.067 58.547,28.067 58.547,23.749 ; 58.547,-21.717 58.547,-6.604 ; 58.547,-0.762 58.547,17.78
Mechanical 15:
  lines w0.508: 11.303,37.084 11.557,36.83 11.557,4.699 98.933,4.699 98.933,11.176 ; 47.117,-19.304 111.633,-19.304

## Dimensions
0.5,-41.5 to 0.5,41.5 on Mechanical 15
0.5,-41.5 to 120.5,-41.5 on Mechanical 15

## Text inside footprints (layer, text, board x,y; h text height)
BR1: Top Overlay "-" at 85.598,27.432 h0.8; Top Overlay "+" at 85.598,38.862 h0.8; Top Overlay "~" at 86.106,33.274 h0.8 r90
C3: Top Overlay "+" at 42.533,9.765 h1.5 r90
C4: Top Overlay "+" at 26.912,2.883 h1.5 r90
C5: Top Overlay "+" at 95.885,38.227 h1.5 r90
C6: Top Overlay "+" at 98.552,7.62 h1.5
C12: Top Overlay "+" at 40.12,-14.095 h1.5 r90
C13: Top Overlay "+" at 23.483,-17.198 h1.5 r90
C15: Top Overlay "+" at 117.729,9.398 h1.5 r180
C17: Top Overlay "+" at 12.266,-8.37 h1.5
C22: Top Overlay "+" at 19.378,20.205 h1.5
T1: Top Overlay "8" at 51.435,12.065 h0.8 r180; Top Overlay "5" at 51.435,26.797 h0.8 r180; Top Overlay "4" at 67.691,26.543 h0.8 r180; Top Overlay "1" at 67.437,12.065 h0.8 r180
T2: Top Overlay "1" at 68.072,-12.573 h0.8 r180; Top Overlay "4" at 68.072,1.905 h0.8 r180; Top Overlay "5" at 50.8,2.159 h0.8 r180; Top Overlay "8" at 50.8,-12.573 h0.8 r180
U3: Top Overlay "1" at 28.829,18.161 h0.8 r270; Top Overlay "3" at 34.163,18.161 h0.8 r270
U4: Top Overlay "5" at 13.822,-23.256 h1.5; Top Overlay "3" at 10.422,-23.256 h1.5; Top Overlay "1" at 7.272,-23.256 h1.5
U6: Top Overlay "1" at 30.734,-2.286 h0.8 r270; Top Overlay "3" at 35.941,-2.032 h0.8 r270
U8: Top Overlay "1" at 14.384,7.097 h0.8; Top Overlay "3" at 17.534,7.097 h0.8; Top Overlay "5" at 20.955,6.858 h0.8